# EAGLE board servo_controller_1.2 (EAGLE 7.3.0)
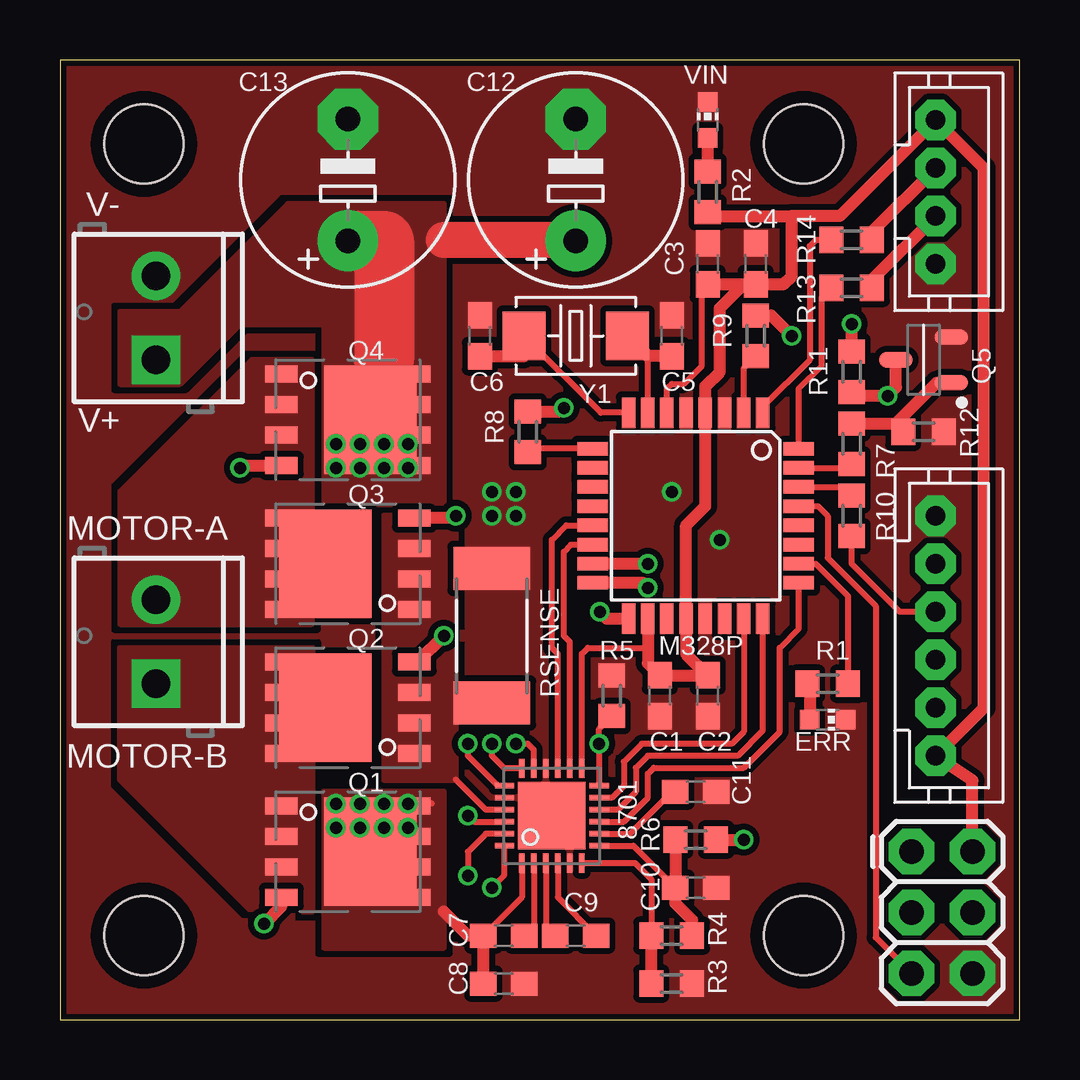
[diagram p0: board, top side]
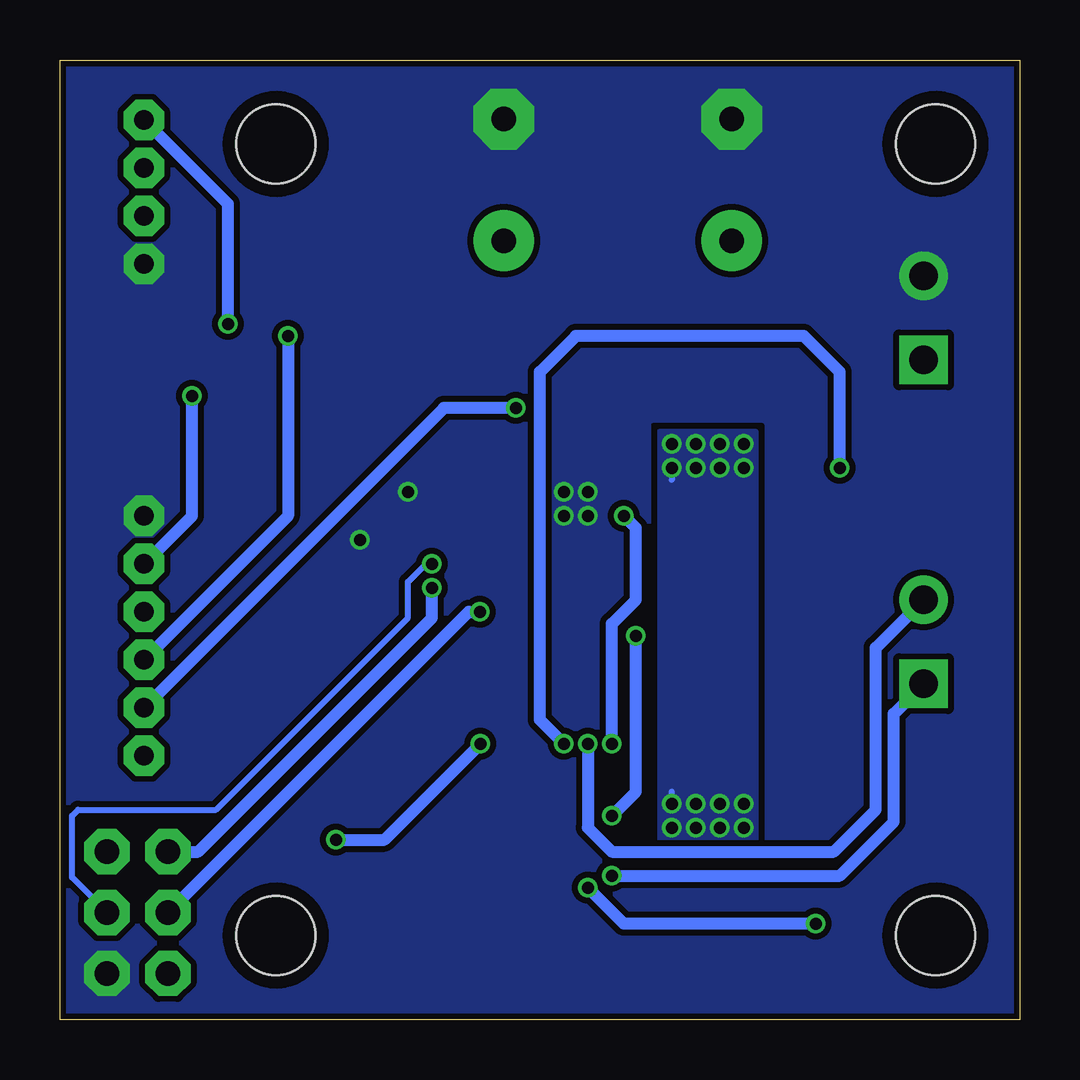
[diagram p1: board, bottom side, seen from below]

Size 40 x 40 mm. Coordinates in mm from the lower left corner, seen from the top.
Outline: 0,0 40,0 40,40 0,40 0,0
Copper layers (1*16): Top 0.035mm / dielectric 1.5mm / Bottom 0.035mm
Design rules "ITEADstudio_DRC": minimum track width 6mil, minimum drill 12mil, track to track 6mil, track to pad 6mil, pad to pad 6mil, via to via 6mil, smd to smd 0mil, copper to edge 10mil, drill to drill 10mil, minimum pad ring 10mil, minimum via ring 6mil, stop-mask expansion 2mil, vias tented up to drill 100mil, thermal gap 10mil

## Footprints (pad centres in the part's own frame; a part is rotated, then mirrored left to right if it is on the bottom)
VQFN24 = smd 0.23 x 0.8: AVDD -1.25,-1.975; DVDD -0.75,-1.975; FAULT -0.25,-1.975; GH2 -1.25,1.975; GL1 1.25,1.975; GL2 -0.25,1.975; IDRIVE 1.25,-1.975; SENSE 0.25,-1.975; SH2 -0.75,1.975; SN 0.75,1.975; SO 0.75,-1.975; SP 0.25,1.975 | smd 0.8 x 0.23: CPH -1.975,0.25; CPL -1.975,-0.25; EN 1.975,-0.75; GH1 1.975,0.75; GND@1 1.975,0.25; GND@2 -1.975,-0.75; PH 1.975,-0.25; SH1 1.975,1.25; SLEEP 1.975,-1.25; VCP -1.975,0.75; VM -1.975,1.25; VREF -1.975,-1.25 | smd 2.8 x 2.8: GND@3 0,0
C0603 = smd 1.1 x 1: 1 -0.85,0; 2 0.85,0
E5-8,5 = drill 1.016 pad 2.54: + -2.54,0 | drill 1.016 pad 2.54 octagon: - 2.54,0
JST-PH6 = drill 0.813 pad 1.676 octagon: 1 5,0; 2 3,0; 3 1,0; 4 -1,0; 5 -3,0; 6 -5,0
JST-PH4 = drill 0.813 pad 1.676 octagon: 1 3,0; 2 1,0; 3 -1,0; 4 -3,0
CHIP-LED0603 = smd 0.8 x 0.8: A 0,-0.75; C 0,0.75
2X3 = drill 1.016 pad 1.88 octagon: 1 0,0; 2 0,2.54; 3 2.54,0; 4 2.54,2.54; 5 5.08,0; 6 5.08,2.54
TQFP32-08 = smd 1.27 x 0.559: 1 -4.293,2.8; 2 -4.293,2; 3 -4.293,1.2; 4 -4.293,0.4; 5 -4.293,-0.4; 6 -4.293,-1.2; 7 -4.293,-2; 8 -4.293,-2.8; 17 4.293,-2.8; 18 4.293,-2; 19 4.293,-1.2; 20 4.293,-0.4; 21 4.293,0.4; 22 4.293,1.2; 23 4.293,2; 24 4.293,2.8 | smd 0.559 x 1.27: 9 -2.8,-4.293; 10 -2,-4.293; 11 -1.2,-4.293; 12 -0.4,-4.293; 13 0.4,-4.293; 14 1.2,-4.293; 15 2,-4.293; 16 2.8,-4.293; 25 2.8,4.293; 26 2,4.293; 27 1.2,4.293; 28 0.4,4.293; 29 -0.4,4.293; 30 -1.2,4.293; 31 -2,4.293; 32 -2.8,4.293
SCREWTERMINAL-3.5MM-2 = drill 1.2 pad 2.032 square: 1 0,0 | drill 1.2 pad 2.032: 2 3.5,0
SON5X6 = smd 0.59 x 0.71: DRAIN@1 -3.161,1.905; DRAIN@2 -3.161,0.635; DRAIN@3 -3.161,-0.635; DRAIN@4 -3.161,-1.905 | smd 3.85 x 4.52: DRAIN@5 -0.941,0 | smd 1.372 x 0.71: GATE 2.77,1.905; SOURCE@1 2.77,-1.905; SOURCE@2 2.77,-0.635; SOURCE@3 2.77,0.635
SOT95P280X135-3N = smd 1.4 x 0.65: 1 -1.15,0.95; 2 -1.15,-0.95; 3 1.15,0
R0603 = smd 1 x 1.1: 1 -0.85,0; 2 0.85,0
R2512 = smd 1.8 x 3.2: 1 -2.8,0; 2 2.8,0
STAND-OFF = hole 3.302: 0,0
X2-SMD-5.0X3.2X1.3MM = smd 1.778 x 2.032: 1 -2.159,0; 2 2.159,0

## Placement (x,y rotation side)
8701  DRV8701  [VQFN24]  20.5,8.5 90 top
C1  100n  [C0603]  25,13.5 270 top
C2  100n  [C0603]  27,13.5 270 top
C3  100n  [C0603]  27,31.5 90 top
C4  100n  [C0603]  29,31.5 90 top
C5  22  [C0603]  25.5,28.5 90 top
C6  22  [C0603]  17.5,28.5 90 top
C7  1u  [C0603]  18.5,3.5 0 top
C8  100n  [C0603]  18.5,1.5 0 top
C9  100n  [C0603]  21.5,3.5 0 top
C10  1u  [C0603]  26.5,5.5 0 top
C11  1u  [C0603]  26.5,9.5 0 top
C12  [E5-8,5]  21.5,35 90 top
C13  [E5-8,5]  12,35 90 top
CONTROL  [JST-PH6]  36.5,16 270 top
ENCODER  [JST-PH4]  36.5,34.5 270 top
ERR  [CHIP-LED0603]  32,12.5 270 top
ISP  [2X3]  35.5,7 270 top
M328P  ATMEGA168  [TQFP32-08]  26.5,21 270 top
MTR  M023.5MM  [SCREWTERMINAL-3.5MM-2]  4,14 90 top
PSU  M023.5MM  [SCREWTERMINAL-3.5MM-2]  4,27.5 90 top
Q1  NEXFET_SINGLECSD18537NQ5A  [SON5X6]  12,7 180 top
Q2  NEXFET_SINGLECSD18537NQ5A  [SON5X6]  12,13 0 top
Q3  NEXFET_SINGLECSD18537NQ5A  [SON5X6]  12,19 0 top
Q4  NEXFET_SINGLECSD18537NQ5A  [SON5X6]  12,25 180 top
Q5  MOSFET-NCH_SOT-23  [SOT95P280X135-3N]  36,27.5 180 top
R1  1k  [R0603]  32,14 180 top
R2  1k  [R0603]  27,34.5 270 top
R3  1k  [R0603]  25.5,1.5 0 top
R4  1k  [R0603]  25.5,3.5 0 top
R5  200k  [R0603]  23,13.5 270 top
R6  68k  [R0603]  26.5,7.5 0 top
R7  330  [R0603]  33,24 90 top
R8  330  [R0603]  19.5,24.5 90 top
R9  330  [R0603]  29,28.5 90 top
R10  330  [R0603]  33,21 270 top
R11  10k  [R0603]  33,27 270 top
R12  10k  [R0603]  36,24.5 0 top
R13  330  [R0603]  33,30.5 0 top
R14  330  [R0603]  33,32.5 0 top
RSENSE  0.01  [R2512]  18,16 270 top
STANDOFF1  STAND-OFF  [STAND-OFF]  3.5,36.5 0 top
STANDOFF2  STAND-OFF  [STAND-OFF]  31,36.5 0 top
STANDOFF3  STAND-OFF  [STAND-OFF]  3.5,3.5 0 top
STANDOFF4  STAND-OFF  [STAND-OFF]  31,3.5 0 top
VIN  [CHIP-LED0603]  27,37.5 0 top
Y1  20M  [X2-SMD-5.0X3.2X1.3MM]  21.5,28.5 0 top

## Library data of the parts
8701 = drv8x
C1-C13 ERR R1-R14 RSENSE VIN = adafruit
CONTROL ENCODER = jst-ph
ISP MTR PSU = SparkFun-Connectors
M328P = SparkFun-DigitalIC
Q1-Q4 = mosfet
Q5 = ipc-7351-transistor
STANDOFF1-STANDOFF4 = SparkFun-Electromechanical
Y1 = OPL-crystal-osctllator; MPN: X053201602002

## Nets
5V: 8701.SLEEP C1.1 C2.1 C3.1 C4.1 CONTROL.1 ENCODER.4 ISP.2 M328P.4 M328P.6 M328P.18 M328P.20 R2.2 R11.1
A: M328P.32 R13.1
B: M328P.1 R14.1
DIR: M328P.9 R8.1
EN: 8701.EN M328P.14
ERR: M328P.31 R7.1
FAULT: 8701.FAULT M328P.25
GND: 8701.GND@1 8701.GND@2 8701.GND@3 8701.SN C1.2 C2.2 C3.2 C4.2 C5.2 C6.2 C8.2 C10.2 C11.2 C12.- C13.- CONTROL.6 ENCODER.1 ERR.C ISP.6 M328P.3 M328P.5 M328P.21 PSU.2 Q5.2 R3.2 R5.1 R12.2 RSENSE.1 VIN.C
ISENSE: 8701.SO M328P.23
MISO: ISP.1 M328P.16
MOSI: ISP.4 M328P.15
N$1: 8701.GL1 Q3.GATE
N$2: 8701.SH1 MTR.2 Q3.DRAIN@1 Q3.DRAIN@2 Q3.DRAIN@3 Q3.DRAIN@4 Q3.DRAIN@5 Q4.SOURCE@1 Q4.SOURCE@2 Q4.SOURCE@3
N$3: 8701.SH2 MTR.1 Q1.SOURCE@1 Q1.SOURCE@2 Q1.SOURCE@3 Q2.DRAIN@1 Q2.DRAIN@2 Q2.DRAIN@3 Q2.DRAIN@4 Q2.DRAIN@5
N$4: 8701.GH2 Q1.GATE
N$5: 8701.SP Q2.SOURCE@1 Q2.SOURCE@2 Q2.SOURCE@3 Q3.SOURCE@1 Q3.SOURCE@2 Q3.SOURCE@3 RSENSE.2
N$6: 8701.GL2 Q2.GATE
N$7: 8701.GH1 Q4.GATE
N$8: R2.1 VIN.A
N$9: C5.1 M328P.7 Y1.2
N$10: ENCODER.2 R13.2
N$11: 8701.VCP C7.2
N$12: 8701.CPL C9.2
N$13: 8701.CPH C9.1
N$14: ENCODER.3 R14.2
N$15: 8701.VREF R3.1 R4.1
N$16: 8701.AVDD C10.1 R4.2 R6.1
N$17: 8701.DVDD C11.1
N$18: C6.1 M328P.8 Y1.1
N$19: ERR.A R1.2
N$20: Q5.1 R7.2 R12.1
N$21: 8701.IDRIVE R5.2 R6.2
N$23: 8701.VM C7.1 C8.1 C12.+ C13.+ PSU.1 Q1.DRAIN@1 Q1.DRAIN@2 Q1.DRAIN@3 Q1.DRAIN@4 Q1.DRAIN@5 Q4.DRAIN@1 Q4.DRAIN@2 Q4.DRAIN@3 Q4.DRAIN@4 Q4.DRAIN@5
N$24: M328P.26 R1.1
N$31: CONTROL.2 R8.2
N$32: CONTROL.3 R9.2
N$33: CONTROL.4 R10.2
N$34: CONTROL.5 Q5.3 R11.2
OVC: 8701.SENSE M328P.24
PH: 8701.PH M328P.13
RES: M328P.30 R10.1
RESET: ISP.5 M328P.29
SCK: ISP.3 M328P.17
STP: M328P.2 R9.1

## Tracks (layer width: path | path; a pad name or v marks a point on that pad's centre or on a via)
5V  (via drill 0.5)
  Top 0.25: 8701.SLEEP 21.75,15.25 22,15.5 24.5,15.5 | M328P.6 25.3,26.3 25.5,26.5 26,26.5 26.75,27.25 26.75,30.4 C3.1
  Top 0.5: C3.1 28.5,30.65 | 28.5,30.65 C4.1 30.15,30.65 30.5,31 30.5,33.5 | ISP.2 38.04,9.96 CONTROL.1 38.5,13 38.5,35.5 ENCODER.4 32.5,33.5 30.5,33.5 | M328P.18 24.5,15.5 24.5,14.85 C1.1 C2.1 26.1,15.25 M328P.20 26.1,20.6 26.9,21.4 M328P.4 26.9,26.4 27.5,27 27.5,29.65 28.5,30.65 | R11.1 v33,29 | R2.2 27.15,33.5 30.5,33.5
  Bottom 0.5: v33,29 33,34 ENCODER.4
A
  Top 0.25: M328P.32 30.79,26.29 31.75,27.25 31.75,30.1 R13.1
B
  Top 0.25: M328P.1 29.3,25.54 31.25,27.49 31.25,32.25 31.5,32.5 R14.1
DIR
  Top 0.25: M328P.9 19.5,23.8
  Top 0.5: 19.5,23.8 R8.1
EN
  Top 0.25: 8701.EN 21.25,15.75 21,16 21,19.5 21.3,19.8 M328P.14
ERR
  Top 0.25: M328P.31 32.85,23 R7.1
FAULT
  Top 0.25: 8701.FAULT 23.5,8.25 24.5,9.25 24.5,10.25 24.75,10.5 28.5,10.5 30,12 30,15.5 30.79,16.29 M328P.25
GND  (via drill 0.5)
  other vias: 25.5,22 27.5,20 18,21 19,21 19,22 18,22
  pour Bottom (isolate 0.25, rank 6, no thermals): 0,0 40,0 40,40 0,40
  pour Top (isolate 0.25, rank 6, no thermals): 0,0 40,0 40,40 0,40
ISENSE
  Top 0.25: M328P.23 28.5,12 28,11.5 24.25,11.5 23.5,10.75 23.5,9.75 23,9.25 8701.SO
MISO  (via drill 0.5)
  Top 0.5: v24.5,18 24.3,18.2 M328P.16
  Bottom 0.5: ISP.1 34.25,7 24.5,16.75 v24.5,18
MOSI  (via drill 0.5)
  Top 0.5: v24.5,19 M328P.15
  Bottom 0.25: ISP.4 39.5,5.92 39.5,8.5 39.25,8.75 33.5,8.75 25.5,16.75 25.5,18.25 24.75,19 v24.5,19
N$1  (via drill 0.5)
  Top 0.25: 8701.GL1 18.25,9.75 17,11 v17,11.5
  Top 0.5: v16.5,21 16.41,20.91 Q3.GATE
  Bottom 0.5: v17,11.5 17,16.5 16,17.5 16,20.5 v16.5,21
N$2  (via drill 0.5)
  Top 0.25: 8701.SH1 18.52,10.47 18,11 v18,11.5
  Bottom 0.5: v18,11.5 18,8 17,7 7.75,7 6,8.75 6,15.5 MTR.2
  pour Top (isolate 0.25, no thermals): 2.5,16.5 10.5,16.5 10.5,27.5 8,27.5 2.5,22
N$3  (via drill 0.5)
  Top 0.25: 8701.SH2 17.75,7.75 17,7 v17,6
  Bottom 0.5: v17,6 7.5,6 5.25,8.25 5.25,12.75 MTR.1
  pour Top (isolate 0.25, no thermals): 10.5,4.5 8,4.5 2.5,10 2.5,15.5 10.5,15.5
N$4  (via drill 0.5)
  Top 0.25: v18,5.5 18.52,6.03 8701.GH2
  Top 0.5: Q1.GATE 9.23,4.73 v8.5,4
  Bottom 0.5: v8.5,4 16.5,4 v18,5.5
N$5
  Top 0.25: 8701.SP 17.75,8.75 16.5,10
  pour Top (isolate 0.25, no thermals): 13.5,10 16.5,10 16.5,21 13.5,21
N$6  (via drill 0.5)
  Top 0.25: v17,8.5 17.25,8.25 8701.GL2
  Top 0.5: v16,16 14.9,14.9 Q2.GATE
  Bottom 0.5: v17,8.5 16,9.5 v16,16
N$7  (via drill 0.5)
  Top 0.25: 8701.GH1 19.75,11.25 19.5,11.5 v19,11.5
  Top 0.5: v7.5,23 7.59,23.09 Q4.GATE
  Bottom 0.5: v19,11.5 20,12.5 20,27 18.5,28.5 9,28.5 7.5,27 v7.5,23
N$8
  Top 0.5: R2.1 VIN.A
N$9
  Top 0.25: M328P.7 24.5,27.64 24.51,27.65
  Top 0.5: C5.1 24.51,27.65 Y1.2
N$10
  Top 0.5: R13.2 33.85,30.85 ENCODER.2
N$11
  Top 0.25: 8701.VCP 19.75,3.9 C7.2
N$12
  Top 0.25: 8701.CPL 20.75,5.1 C9.2
N$13
  Top 0.25: 8701.CPH 20.25,3.9 C9.1
N$14
  Top 0.5: R14.2 33.85,32.85 ENCODER.3
N$15
  Top 0.25: 8701.VREF 23.98,6.53 24.65,5.85 R4.1
  Top 0.5: R3.1 R4.1
N$16
  Top 0.25: 8701.AVDD 23.9,7.25 C10.1
  Top 0.5: R4.2 26.35,4.15 25.65,4.85 C10.1 R6.1
N$17
  Top 0.25: 8701.DVDD 23.75,7.75 25.5,9.5 C11.1
N$18
  Top 0.25: M328P.8 22.55,25.29 Y1.1
  Top 0.5: C6.1 19.34,27.65 Y1.1
N$19
  Top 0.5: R1.2 31.25,13.9 ERR.A
N$20
  Top 0.5: R12.1 35.15,25.15 | 35.15,25.15 36.55,26.55 Q5.1 | R7.2 34.85,24.85 35.15,25.15
N$21  (via drill 0.5)
  Top 0.25: R5.2 22.48,12.12 v22.48,11.5 8701.IDRIVE
  Top 0.5: R6.2 v28.5,7.5
  Bottom 0.5: v28.5,7.5 26.48,7.5 v22.48,11.5
N$23  (via drill 0.5)
  Top 0.25: 8701.VM 19.25,5.1 C7.1 | Q1.DRAIN@4 15.47,9.03 15.5,9 v14.5,9 | Q4.DRAIN@1 15.03,23.02 v14.5,23
  Top 0.5: C8.1 C7.1 17,3.5 16,4.5
  Top 1.5: 21.5,32.5 16,32.5
  Top 2.5: C13.+ 13.5,32.46 13.5,27.5 | C12.+ 21.5,32.5
  Bottom 0.25: v14.5,9 14.5,9.5 | v14.5,23 14.5,22.5
  other vias: 13.5,9 12.5,9 11.5,9 13.5,23 12.5,23 11.5,23 11.5,24 12.5,24 13.5,24 14.5,24 11.5,8 12.5,8 13.5,8 14.5,8
  pour Bottom (isolate 0.25, no thermals): 15,8.5 11,8.5 11,24.5 15,24.5
  pour Top (isolate 0.25, no thermals): 2.5,29.5 2.5,26.5 5,26.5 7.5,29 11,29 11,21.5 16,21.5 16,34 9.5,34 5,29.5
  pour Top (isolate 0.25, no thermals): 16,9.5 11,9.5 11,3 16,3
  pour Bottom (isolate 0.25, no thermals): 15,7.5 11,7.5 11,23.5 15,23.5
N$24
  Top 0.25: M328P.26 31.5,19 32.85,17.65 R1.1
N$31  (via drill 0.5)
  Top 0.5: R8.2 20.85,25.35 v21,25.5
  Bottom 0.5: v21,25.5 24,25.5 CONTROL.2
N$32  (via drill 0.5)
  Top 0.5: R9.2 29.65,29.35 v30.5,28.5
  Bottom 0.5: v30.5,28.5 30.5,21 CONTROL.3
N$33
  Top 0.25: CONTROL.4 35,17 33,19 R10.2
N$34  (via drill 0.5)
  Top 0.25: 33.15,26 R11.2
  Top 0.5: 33.15,26 v34.5,26 34.85,26.35 Q5.3
  Bottom 0.5: CONTROL.5 34.5,21 v34.5,26
OVC
  Top 0.25: 8701.SENSE 23.25,8.75 24,9.5 24,10.5 24.5,11 28.25,11 29.3,12.05 M328P.24
PH
  Top 0.25: 8701.PH 20.75,15.25 20.5,15.5 20.5,20 21.1,20.6 M328P.13
RES
  Top 0.25: M328P.30 32.65,22.2 R10.1
RESET
  Top 0.25: ISP.5 34,3.42 34,17.25 32,19.25 32,21 31.6,21.4 M328P.29
SCK  (via drill 0.5)
  Top 0.5: M328P.17 22.79,16.71 v22.5,17
  Bottom 0.5: ISP.3 22.96,17 v22.5,17
STP
  Top 0.25: M328P.2 28.5,27.15 R9.1

## Text on the board
tNames: V- | V+ | MOTOR-A | MOTOR-B
Measures: 3.5 | 33 | 3.5 | 3.5 | 27.5 | 9